# EAGLE board TheBakaKeyboard (EAGLE 7.7.0)
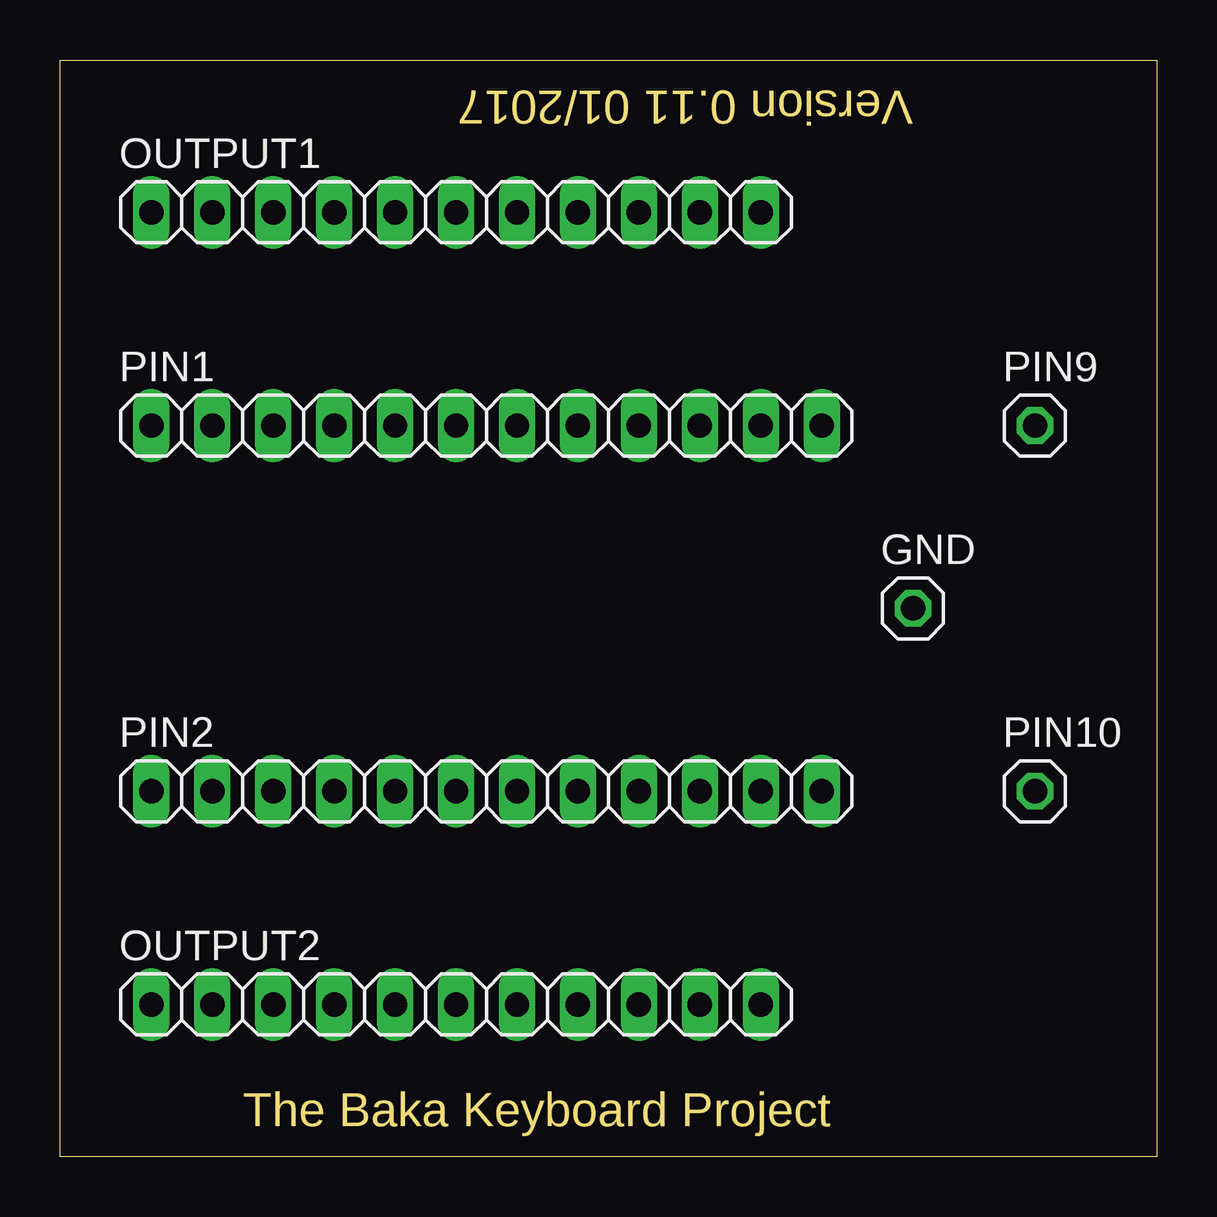
[diagram p0: board, top side]
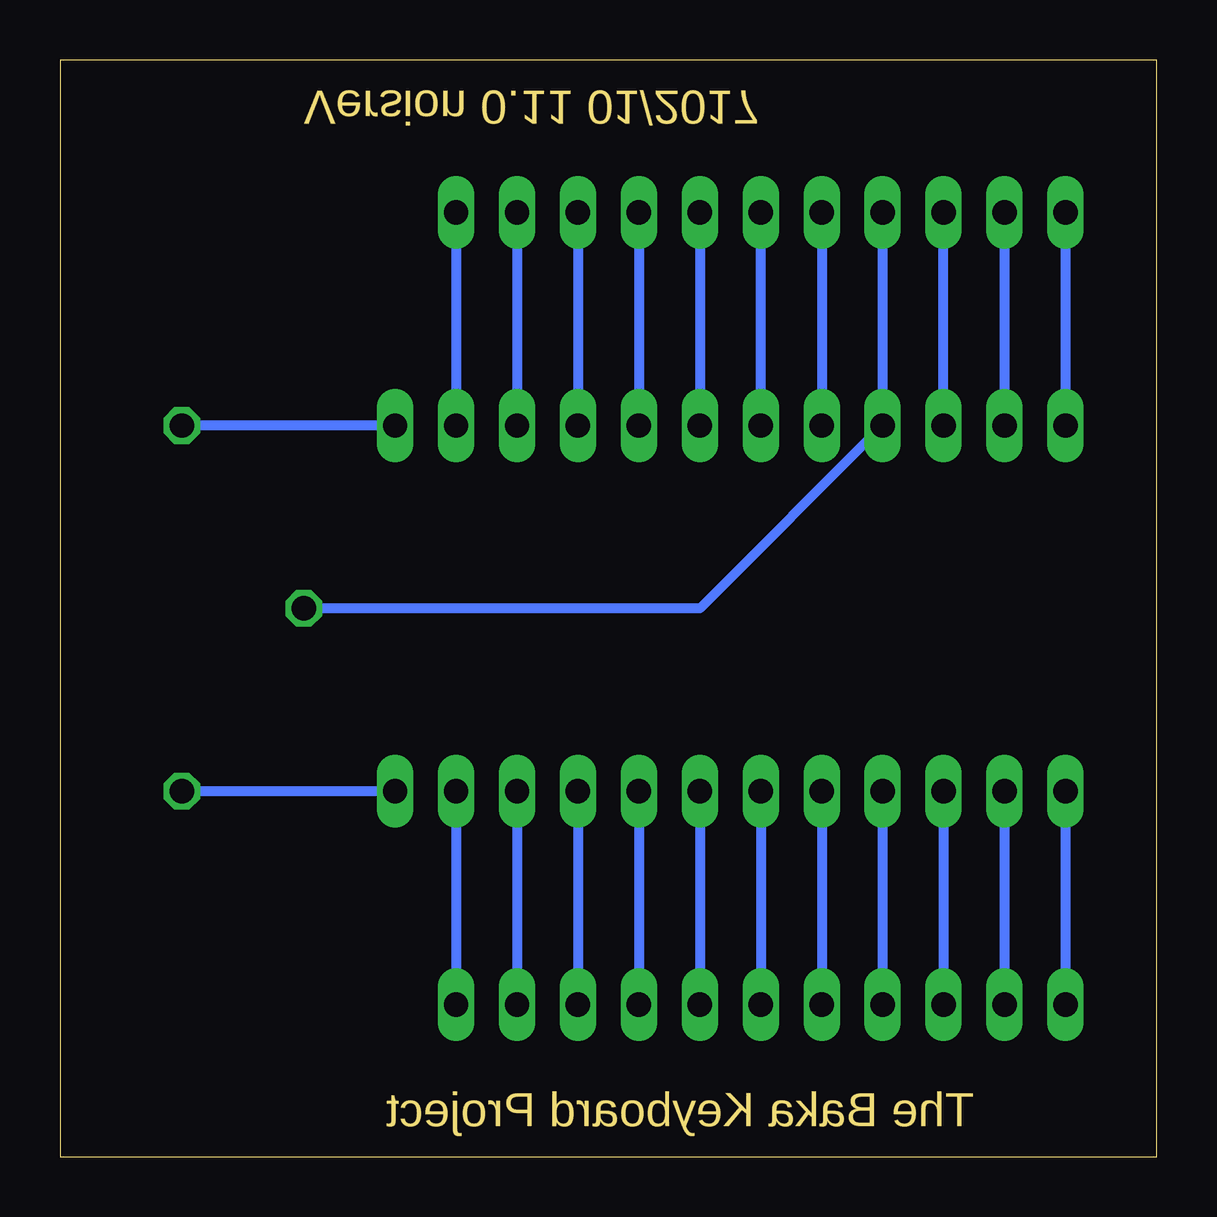
[diagram p1: board, bottom side, seen from below]

Size 45.72 x 45.72 mm. Coordinates in mm from the lower left corner, seen from the top.
Outline: 0,0 0,45.72 45.72,45.72 45.72,0 0,0
Copper layers (1*16): Top 0.035mm / dielectric 1.5mm / Bottom 0.035mm
Design rules "default": minimum track width 10mil, minimum drill 24mil, track to track 8mil, track to pad 8mil, pad to pad 8mil, via to via 8mil, smd to smd 8mil, copper to edge 40mil, drill to drill 8mil, minimum pad ring 10mil, minimum via ring 8mil, stop-mask expansion 4mil, vias tented up to drill 0mil, thermal gap 10mil

## Footprints (pad centres in the part's own frame; a part is rotated, then mirrored left to right if it is on the bottom)
1X01 = drill 1.016 octagon: 1 0,0
1X11 = drill 1.016 long: 1 -12.7,0; 2 -10.16,0; 3 -7.62,0; 4 -5.08,0; 5 -2.54,0; 6 0,0; 7 2.54,0; 8 5.08,0; 9 7.62,0; 10 10.16,0; 11 12.7,0
1X12 = drill 1.016 long: 1 -13.97,0; 2 -11.43,0; 3 -8.89,0; 4 -6.35,0; 5 -3.81,0; 6 -1.27,0; 7 1.27,0; 8 3.81,0; 9 6.35,0; 10 8.89,0; 11 11.43,0; 12 13.97,0

## Placement (x,y rotation side)
GND  [1X01]  35.56,22.86 0 top
OUTPUT1  [1X11]  16.51,39.37 0 top
OUTPUT2  [1X11]  16.51,6.35 0 top
PIN1  [1X12]  17.78,30.48 0 top
PIN2  [1X12]  17.78,15.24 0 top
PIN9  [1X01]  40.64,30.48 0 top
PIN10  [1X01]  40.64,15.24 0 top

## Library data of the parts
GND OUTPUT1 OUTPUT2 PIN1 PIN2 PIN9 PIN10 = pinhead

## Nets
GND: GND.1 OUTPUT1.4 PIN1.4
PIN9: PIN1.12 PIN9.1
PIN10: PIN2.12 PIN10.1
S$1: OUTPUT1.1 PIN1.1
S$2: OUTPUT1.2 PIN1.2
S$3: OUTPUT1.3 PIN1.3
S$4: OUTPUT2.1 PIN2.1
S$5: OUTPUT1.5 PIN1.5
S$6: OUTPUT1.6 PIN1.6
S$7: OUTPUT1.7 PIN1.7
S$8: OUTPUT1.8 PIN1.8
S$9: OUTPUT1.9 PIN1.9
S$10: OUTPUT1.10 PIN1.10
S$11: OUTPUT1.11 PIN1.11
S$12: OUTPUT2.2 PIN2.2
S$13: OUTPUT2.3 PIN2.3
S$14: OUTPUT2.4 PIN2.4
S$15: OUTPUT2.5 PIN2.5
S$16: OUTPUT2.6 PIN2.6
S$17: OUTPUT2.7 PIN2.7
S$18: OUTPUT2.8 PIN2.8
S$19: OUTPUT2.9 PIN2.9
S$20: OUTPUT2.10 PIN2.10
S$21: OUTPUT2.11 PIN2.11

## Tracks (layer width: path | path; a pad name or v marks a point on that pad's centre or on a via)
GND
  Bottom 0.406: OUTPUT1.4 PIN1.4 19.05,22.86 GND.1
PIN9
  Bottom 0.406: PIN1.12 PIN9.1
PIN10
  Bottom 0.406: PIN2.12 PIN10.1
S$1
  Bottom 0.406: OUTPUT1.1 PIN1.1
S$2
  Bottom 0.406: OUTPUT1.2 PIN1.2
S$3
  Bottom 0.406: PIN1.3 OUTPUT1.3
S$4
  Bottom 0.406: PIN2.1 OUTPUT2.1
S$5
  Bottom 0.406: OUTPUT1.5 PIN1.5
S$6
  Bottom 0.406: PIN1.6 OUTPUT1.6
S$7
  Bottom 0.406: OUTPUT1.7 PIN1.7
S$8
  Bottom 0.406: OUTPUT1.8 PIN1.8
S$9
  Bottom 0.406: OUTPUT1.9 PIN1.9
S$10
  Bottom 0.406: OUTPUT1.10 PIN1.10
S$11
  Bottom 0.406: OUTPUT1.11 PIN1.11
S$12
  Bottom 0.406: PIN2.2 OUTPUT2.2
S$13
  Bottom 0.406: PIN2.3 OUTPUT2.3
S$14
  Bottom 0.406: PIN2.4 OUTPUT2.4
S$15
  Bottom 0.406: PIN2.5 OUTPUT2.5
S$16
  Bottom 0.406: PIN2.6 OUTPUT2.6
S$17
  Bottom 0.406: PIN2.7 OUTPUT2.7
S$18
  Bottom 0.406: PIN2.8 OUTPUT2.8
S$19
  Bottom 0.406: PIN2.9 OUTPUT2.9
S$20
  Bottom 0.406: PIN2.10 OUTPUT2.10
S$21
  Bottom 0.406: PIN2.11 OUTPUT2.11

## Text on the board
Dimension: Version 0.11 01/2017 | The Baka Keyboard Project